# Altium PCB roneMotorBoard-v10.PcbDoc (part 1 of 2)
Units mil, origin at the board's own origin, x right, y up, seen from the top; angles counter-clockwise.
Board outline 3702 x 3936.38 mil, 2 copper layers (Top Layer, Bottom Layer); 100 components, 85 nets, 395 pads, 263 vias.
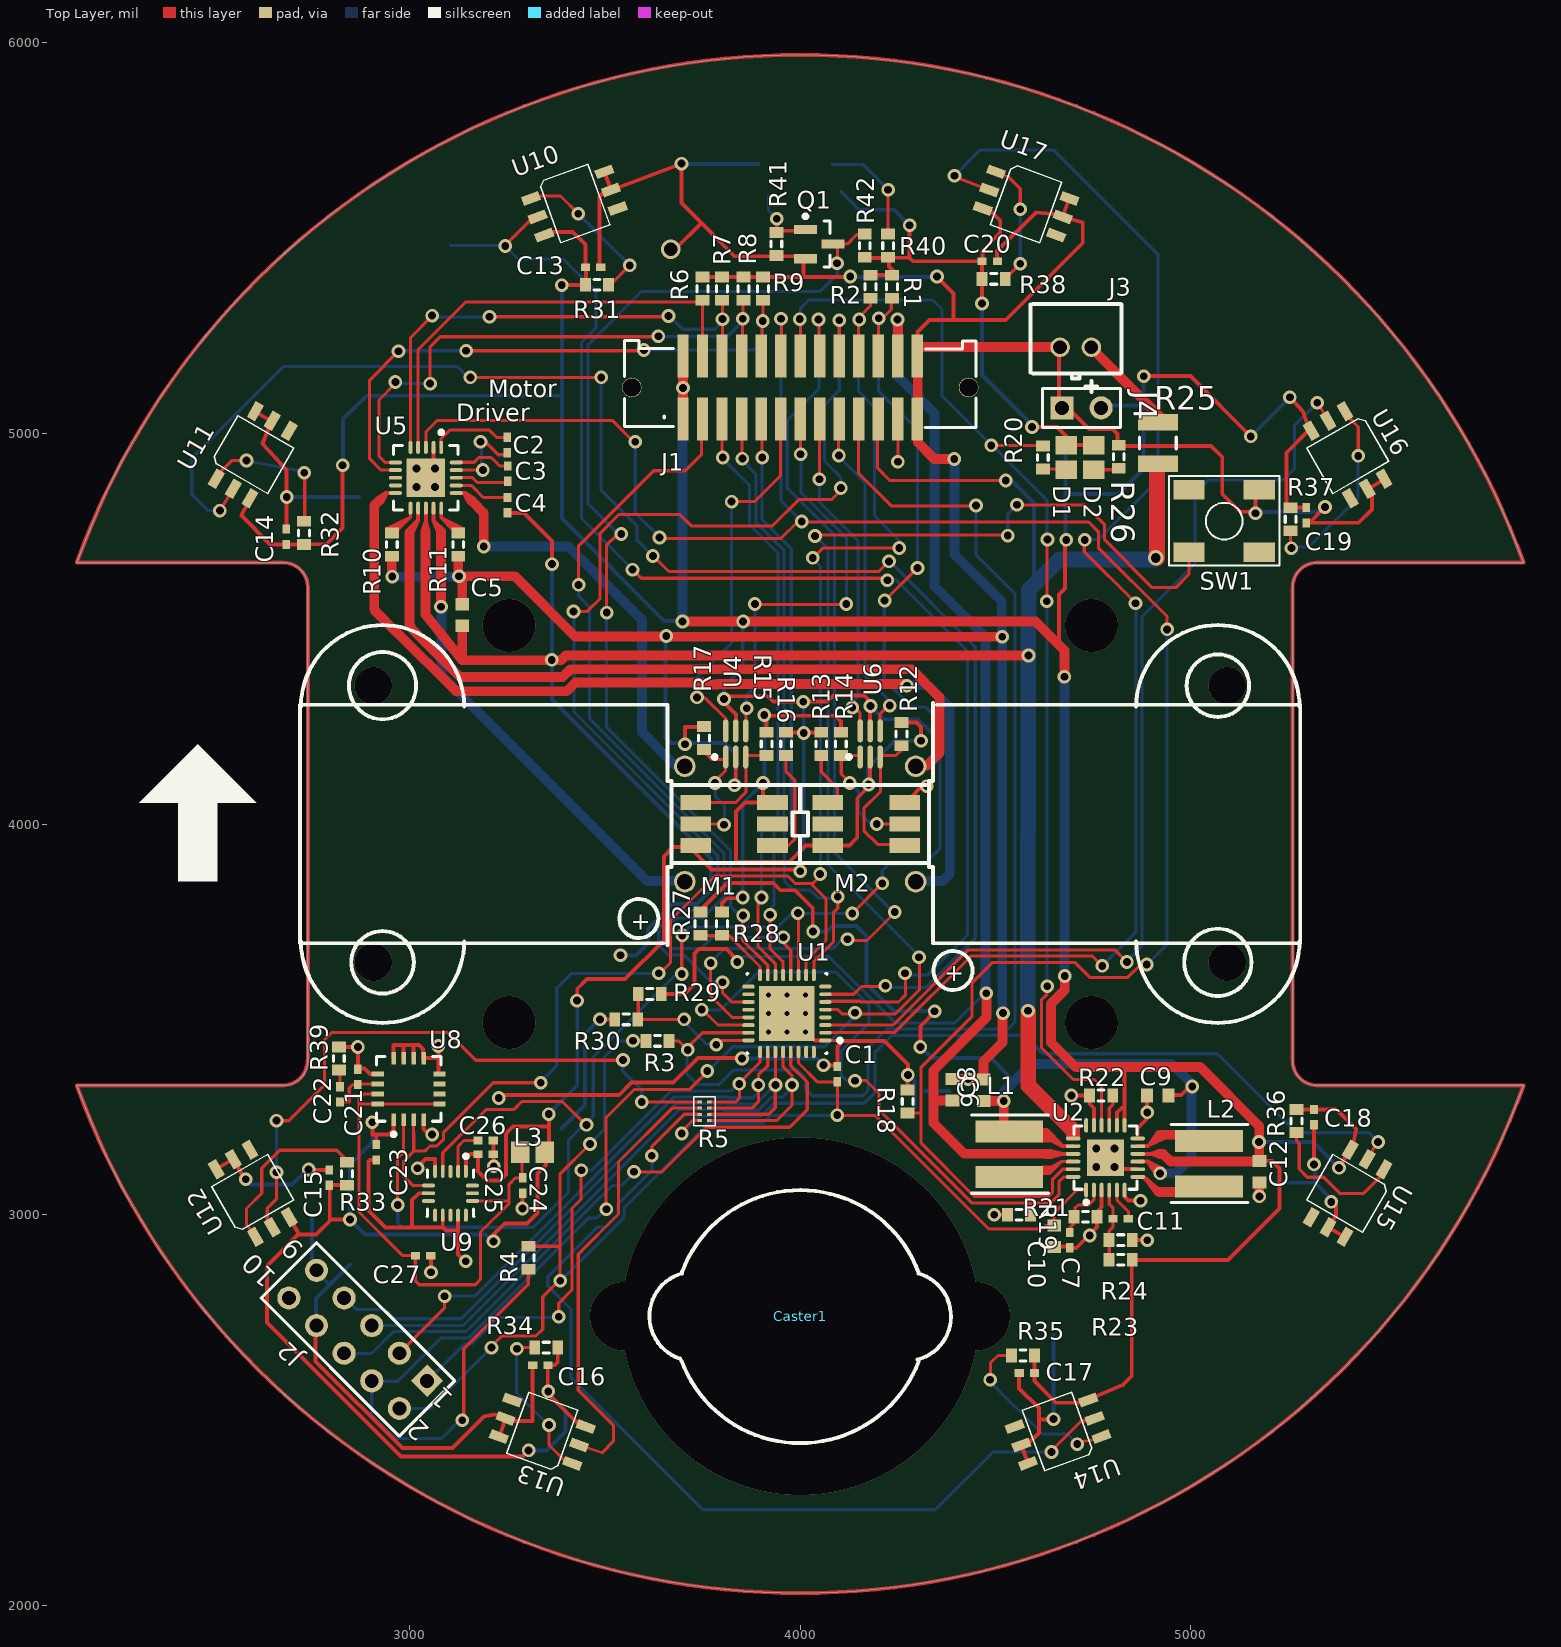
[diagram p0: Top Layer view]
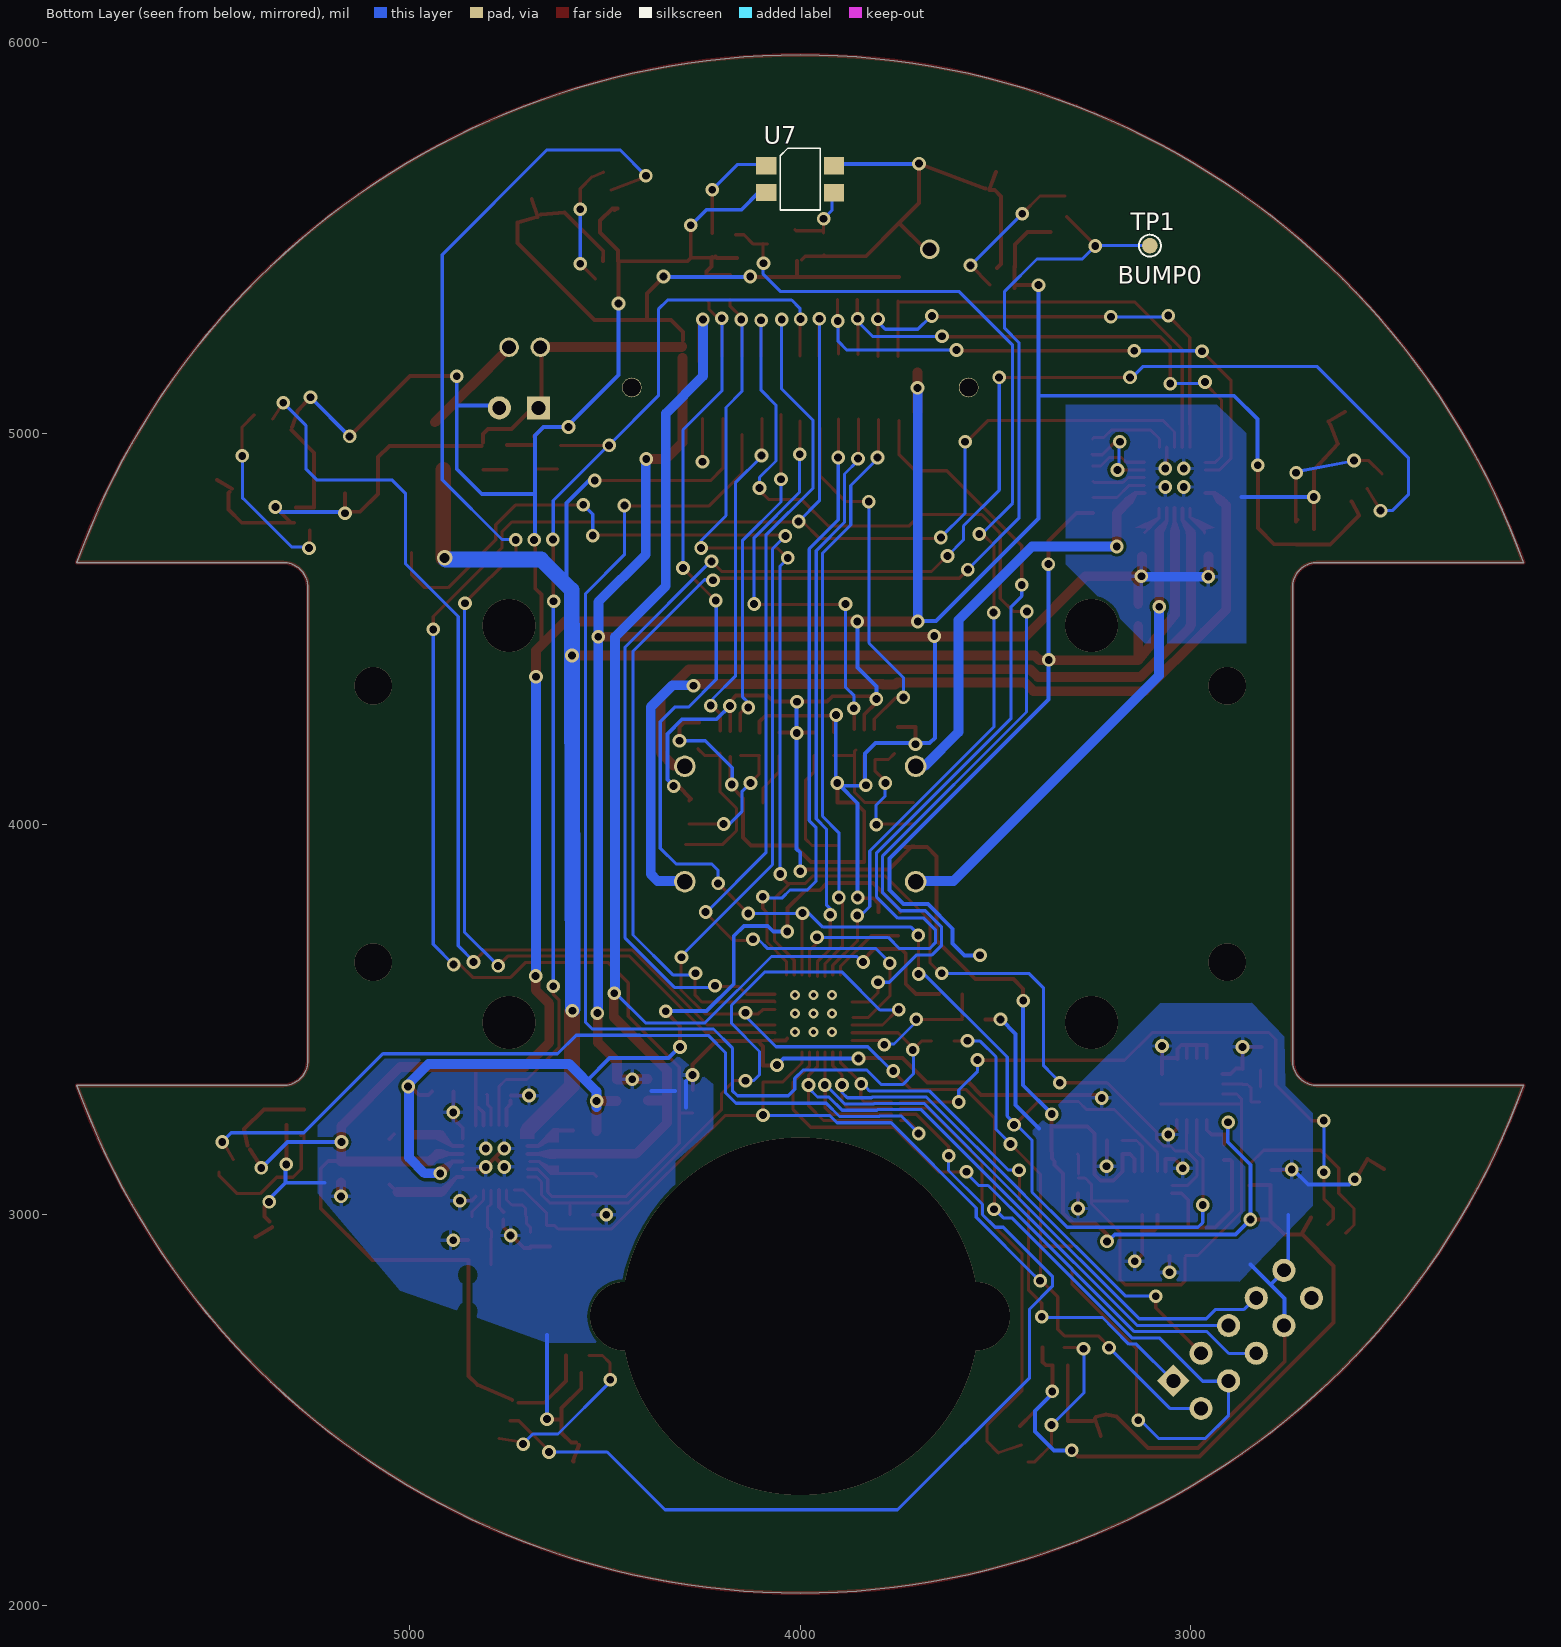
[diagram p1: Bottom Layer view, seen from below]

## Layer stack, top to bottom
Top Layer: signal copper 1.4
Dielectric: dielectric 12.6, FR-4, Dk 4.8
Bottom Layer: signal copper 1.4

## Board outline
2149,3331 2677,3331 ccw(c2677,3394) 2740,3394 2740,4606 ccw(c2677,4606) 2677,4669 2149,4669 cw(c4000,4000) 5851,4669 5323,4669 ccw(c5323,4606) 5260,4606 5260,3394 ccw(c5323,3394) 5323,3331 5851,3331 cw(c4000,4000)

## Design rules (kind name [scope] priority, off if disabled: settings)
Clearance [All] p1: gap=8
PolygonConnect [All] p1: connectstyle=Relief reliefconductorwidth=10 reliefentries=4 polygonreliefangle="90 Angle"
RoutingVias RoutingVias_4 [(IsVia AND InNetClass('All Nets'))] p1: holewidth=20 width=35 viastyle="Through Hole" minholewidth=20 minwidth=35 maxholewidth=20 maxwidth=35
RoutingVias RoutingVias_3 [(IsVia AND InNetClass('All Nets'))] p2: holewidth=20 width=35 viastyle="Through Hole" minholewidth=20 minwidth=35 maxholewidth=20 maxwidth=35
RoutingVias RoutingVias_2 [(IsVia AND InNetClass('All Nets'))] p3: holewidth=20 width=35 viastyle="Through Hole" minholewidth=20 minwidth=35 maxholewidth=20 maxwidth=35
RoutingVias RoutingVias_1 [(IsVia AND InNetClass('All Nets'))] p4: holewidth=20 width=35 viastyle="Through Hole" minholewidth=20 minwidth=35 maxholewidth=20 maxwidth=35
RoutingVias [All] p5: holewidth=20 width=35 viastyle="Through Hole" minholewidth=20 minwidth=35 maxholewidth=20 maxwidth=35
SMDNeckDown [All] p1: percent=50.000
SilkscreenOverComponentPads [All] p1: minsilkscreentomaskgap=10
SolderMaskExpansion [All] p1: expansion=4
Width "Schematic Width Constraint_8" [InNet('3.3V')] p1: maxlimit=100 minlimit=10 preferedwidth=25 minimp=50.000000 maximp=50.000000 favimp=50.000000
Width "Schematic Width Constraint_7" [InNet('VBAT')] p2: maxlimit=50 minlimit=10 preferedwidth=25 minimp=50.000000 maximp=50.000000 favimp=50.000000
Width "Schematic Width Constraint_6" [InNet('VBAT +300')] p3: maxlimit=25 minlimit=10 preferedwidth=25 minimp=50.000000 maximp=50.000000 favimp=50.000000
Width "Schematic Width Constraint_5" [InNet('NetJ3_1')] p4: maxlimit=25 minlimit=10 preferedwidth=25 minimp=50.000000 maximp=50.000000 favimp=50.000000
Width "Schematic Width Constraint_4" [InNet('NetL2_1')] p5: maxlimit=25 minlimit=10 preferedwidth=25 minimp=50.000000 maximp=50.000000 favimp=50.000000
Width "Schematic Width Constraint_3" [InNet('NetL2_2')] p6: maxlimit=25 minlimit=10 preferedwidth=25 minimp=50.000000 maximp=50.000000 favimp=50.000000
Width "Schematic Width Constraint_2" [InNet('5VUSB')] p7: maxlimit=25 minlimit=10 preferedwidth=25 minimp=50.000000 maximp=50.000000 favimp=50.000000
Width "Schematic Width Constraint" [InNet('GND')] p8: maxlimit=25 minlimit=10 preferedwidth=25 minimp=50.000000 maximp=50.000000 favimp=50.000000
Width "Schematic Width Constraint_12" [InNet('MOT_0B')] p9: maxlimit=25 minlimit=10 preferedwidth=20 minimp=50.000000 maximp=50.000000 favimp=50.000000
Width "Schematic Width Constraint_11" [InNet('MOT_0A')] p10: maxlimit=25 minlimit=10 preferedwidth=20 minimp=50.000000 maximp=50.000000 favimp=50.000000
Width "Schematic Width Constraint_10" [InNet('MOT1_B')] p11: maxlimit=25 minlimit=10 preferedwidth=20 minimp=50.000000 maximp=50.000000 favimp=50.000000
Width "Schematic Width Constraint_9" [InNet('MOT1_A')] p12: maxlimit=25 minlimit=10 preferedwidth=20 minimp=50.000000 maximp=50.000000 favimp=50.000000
Width MotorWidth [InNetClass('MotorNets')] p13: maxlimit=25 minlimit=8 preferedwidth=25
Width [All] p14: maxlimit=8 minlimit=8 preferedwidth=8
27 further rules are at their usual default settings.

## Classes and differential pairs
component class motorEncoder: C2 C3 C4 C5 Caster1 CasterBack1 M1 M2 M? R6 R7 R8 R9 R10 R11 R12 R13 R14 R15 R16 R17 U4 U5 U6
component class BumpSensors: C13 C14 C15 C16 C17 C18 C19 C20 R31 R32 R33 R34 R35 R36 R37 R38 TP1 U10 U11 U12 U13 U14 U15 U16 U17
component class GyroAccel: C21 C22 C23 C24 C25 C26 C27 L3 R39 U8 U9
component class MSP430: C1 J1 J2 R1 R2 R3 R4 R5 SW1 U1
component class power: C6 C7 C8 C9 C10 C11 C12 D1 D2 J3 J4 L1 L2 R18 R19 R20 R21 R22 R23 R24 R25 R26 R27 R28 R29 R30 U2 U3
component class LineCliffSensors: Q1 R40 R41 R42 U7

## Components (designator, comment, footprint, x,y, rotation, side; value= is the part's Value field where it differs from the comment)
C1 "Cap Semi" CAPC1005L 4095,3360 r270 top
C2 "Cap Semi" CAPC1005L 3250,4970 r90 top
C3 "Cap Semi" CAPC1005L 3251.31,4896.63 r90 top
C4 "Cap Semi" CAPC1005L 3251,4816 r90 top
C5 "Cap Semi" CAPC1608L 3135,4535 r270 top
C6 "Cap" CAPC1608L 4390,3320 r270 top
C7 "Cap" CAPC1005L 4690,2935 r90 top
C8 "Cap" CAPC1608L 4469.5,3318.5 r270 top
C9 "Cap" CAPC1608L 4915,3305 r180 top
C10 "Cap" CAPC1608L 4650,2945 r270 top
C11 "Cap" CAPC1005L 4820,2990 r0 top
C12 "Cap" CAPC1608L 5175,3110 r90 top
C13 "Cap Semi" CAPC1005L 3470,5425 r180 top
C14 "Cap Semi" CAPC1005L 2685,4735 r270 top locked
C15 "Cap Semi" CAPC1005L 2795,3095 r270 top
C16 "Cap Semi" CAPC1005L 3335,2615 r0 top
C17 "Cap Semi" CAPC1005L 4580,2595 r0 top
C18 "Cap Semi" CAPC1005L 5315,3250 r90 top locked
C19 "Cap Semi" CAPC1005L 5295,4790 r90 top
C20 "Cap Semi" CAPC1005L 4485,5440 r180 top locked
C21 "Cap Semi" CAPC1005L 2868,3353 r90 top
C22 "Cap Semi" CAPC1005L 2822.5,3308 r90 top
C23 "Cap Semi" CAPC1005L 2915,3160 r90 top
C24 "Cap Semi" CAPC1005L 3290,3075 r90 top
C25 "Cap Semi" CAPC1005L 3195,3155 r180 top
C26 "Cap Semi" CAPC1005L 3195,3190 r180 top
C27 "Cap Semi" CAPC1005L 3035,2895 r180 top
Caster1 "non connect" "3/4\"CASTER2" 4000,2740 r180 top locked
D1 "Charge" INDC2012L 4681,4938 r270 top
D2 "Power" INDC2012L 4751,4938 r270 top
J1 "HCOMM/MOT" "HeaderSM 13x2" 4000,5117 r90 top locked
J2 "JTAG" HDR2X5 3045,2575 r135 top locked
J3 "Bat" BatteryConnJST 4705,5220 r180 top
J4 "3.3V conn" HDR1X2 4670,5065 r0 top
L1 "3.3uH" IndPow 4535,3155 r90 top
L2 "2.2uH" IndPow 5046,3131 r90 top locked
L3 "Inductor" INDC2012L 3315,3160 r0 top
M1 "motorEncoder_V7b" motorEncoder_V7b 3830,4000 r180 top locked
M2 "motorEncoder_V7b" motorEncoder_V7b 4170,4000 r0 top locked
Q1 "NPN" SOT-23 4049,5484 r0 top
R1 "Res3" RESC1608L 4235,5375 r90 top
R2 "Res3" RESC1608L 4180,5375 r90 top
R3 "Res3" RESC1608L 3635,3445 r180 top
R4 "Res3" RESC1608L 3305,2890 r90 top
R5 "0" "4-RES ARRAY" 3755,3265 r180 top
R6 "Res3" RESC1608L 3750,5370 r90 top
R7 "Res3" RESC1608L 3800,5370 r90 top
R8 "Res3" RESC1608L 3855,5370 r90 top
R9 "Res3" RESC1608L 3905,5370 r90 top
R10 "Res3" RESC1608L 2955,4715 r270 top
R11 "Res3" RESC1608L 3125,4715 r270 top
R12 "" RESC1608L 4259,4230 r270 top
R13 "" RESC1608L 4054,4205 r90 top
R14 "" RESC1608L 4104,4205 r270 top
R15 "" RESC1608L 3914,4205 r90 top
R16 "" RESC1608L 3964,4205 r90 top
R17 "" RESC1608L 3754,4220 r270 top
R18 "Res3" RESC1608L 4275,3290 r270 top
R19 "Res3" RESC1608L 4560,3000 r0 top
R20 "Res3" RESC1608L 4621,4938 r270 top
R21 "Res3" RESC1608L 4730,2995 r180 top
R22 "Res3" RESC1608L 4770,3305 r180 top
R23 "Res3" RESC1608L 4820,2885 r180 top
R24 "Res3" RESC1608L 4820,2935 r0 top
R25 "Res3" RESC3225L 4915,4975 r90 top
R26 "Res3" RESC1608L 4815,4940 r270 top
R27 "Res3" RESC1608L 3745,3745 r90 top
R28 "Res3" RESC1608L 3800,3745 r270 top
R29 "Res3" RESC1608L 3615,3565 r0 top
R30 "Res3" RESC1608L 3555,3500 r0 top
R31 "Res3" RESC1608L 3480,5380 r180 top
R32 "Res3" RESC1608L 2730,4745 r270 top
R33 "Res3" RESC1608L 2840,3105 r270 top
R34 "Res3" RESC1608L 3350,2660 r0 top
R35 "Res3" RESC1608L 4570,2640 r0 top
R36 "Res3" RESC1608L 5270,3240 r90 top locked
R37 "Res3" RESC1608L 5255,4780 r90 top
R38 "Res3" RESC1608L 4495,5395 r180 top locked
R39 "Res3" RESC1608L 2819.5,3400 r270 top
R40 "Res3" RESC1608L 4225,5480 r90 top
R41 "Res3" RESC1608L 3939,5484 r270 top
R42 "Res3" RESC1608L 4165,5480 r270 top
SW1 "reset button" SwitchTall-TL330 5085,4775 r0 top
TP1 "TestPoint" TestPoint 3105,5480 r180 bottom
U1 "MSP430" MSP430_32PIN 3966,3515 r180 top locked
U2 "LTC3566" QFN-24 4781,3146 r90 top
U4 "schmit trigger" DCK(R-PDSO-C6) 3835,4205 r90 top
U5 "MOTOR-A3906" QFN-20 3042,4886 r270 top locked
U6 "schmit trigger" DCK(R-PDSO-C6) 4179,4205 r90 top
U7 "GP2S27TJ000F" GP2S27J0000F 4000,5650 r180 bottom locked
U8 "L3G4200D" L3G2004D 2998,3322 r90 top locked
U9 "MMA8452Q" MMA8452Q 3105,3055 r270 top locked
U10 "SFH9240-Z" SFH9240-Z 3422,5588 r20 top locked
U11 "SFH9240-Z" SFH9240-Z 2599,4945 r60 top locked
U12 "SFH9240-Z" SFH9240-Z 2599,3055 r120 top locked
U13 "SFH9240-Z" SFH9240-Z 3340,2445 r160 top locked
U14 "SFH9240-Z" SFH9240-Z 4660,2445 r200 top locked
U15 "SFH9240-Z" SFH9240-Z 5401,3055 r240 top locked
U16 "SFH9240-Z" SFH9240-Z 5401,4945 r300 top locked
U17 "SFH9240-Z" SFH9240-Z 4578,5588 r340 top locked

## Footprints (in the part's own frame and the unit in brackets; to place one, negate y for a bottom-side part, rotate by r counter-clockwise, add the part's x,y. Pads: shape width x height; smd on the part's side, far side on the other; paste and mask are expansions set on the pad)
"3/4\"CASTER2" [mil] "3/4\" caster for board"
  silkscreen extent -386,-323 386,324
"4-RES ARRAY" [mm]
  rect 0.3x0.2 smd mask+0.05: 1(-0.3,0.6) 2(-0.3,0.2) 3(-0.3,-0.2) 4(-0.3,-0.6) 5(0.3,-0.6) 6(0.3,-0.2) 7(0.3,0.2) 8(0.3,0.6)
  silkscreen extent -0.71,-0.94 0.69,0.94
BatteryConnJST [mil] "Connector for Battery"
  round 50 hole 35: 1(-40,0) 2(40,0)
  silkscreen extent -117,-110 116,115
CAPC1005L [mm] "Chip Capacitor, Body 1.0x0.5mm, IPC High Density"
  rect 0.6x0.5 smd: 1(-0.5,0) 2(0.5,0)
  body extent -0.55,-0.3 0.55,0.3, height 1.3
CAPC1608L [mm] "Chip Capacitor, Body 1.6x0.8mm, IPC High Density"
  rect 0.8x0.9 smd: 1(-0.7,0) 2(0.7,0)
  body extent -0.87,-0.48 0.87,0.48, height 1.3
DCK(R-PDSO-C6) [mm] "TSOP, 6-Leads, Body 2.2x1.4mm (max), Pitch 0.65mm, IPC Medium Density"
  oval 1.5x0.35 smd: 1(-0.85,0.65) 2(-0.85,0) 3(-0.85,-0.65) 4(0.85,-0.65) 5(0.85,0) 6(0.85,0.65)
  silkscreen extent -0.97,1.25 -0.73,1.5, body extent -0.7,-1.07 0.7,1.08, height 1.1
GP2S27J0000F [mil] "Phototransistor Output, Compact Reflective Photointerrupter"
  rect 52x44 smd: 1(-86.61,34.45) 2(-86.61,-33.74) 3(86.61,-34.45) 4(86.61,34.45)
  silkscreen extent -51,-79 51,79, body extent -59,-78 59,79, height 67
HDR1X2 [mm] "Connector; Header; 2 Position"
  rect 1.5x1.5 hole 0.9: 1(0,0)
  round 1.5 hole 0.9: 2(2.54,0)
  silkscreen extent -1.27,-1.27 3.81,1.27
HDR2X5 [mm] "Connector; Header; 5x2 Position"
  rect 1.5x1.5 hole 0.9: 1(0,0)
  round 1.5 hole 0.9: 2(0,2.54) 3(2.54,0) 4(2.54,2.54) 5(5.08,0) 6(5.08,2.54) 7(7.62,0) 8(7.62,2.54) 9(10.16,0) 10(10.16,2.54)
  silkscreen extent -1.27,-1.27 11.43,3.81
"HeaderSM 13x2" [mm]
  rect 2.795x0.74 smd: 1(-2.032,7.62) 2(2.033,7.62) 3(-2.032,6.35) 4(2.033,6.35) 5(-2.032,5.08) 6(2.033,5.08) 7(-2.032,3.81) 8(2.033,3.81) 9(-2.032,2.54) 10(2.033,2.54) 11(-2.032,1.27) 12(2.033,1.27) 13(-2.032,0) 14(2.033,0) 15(-2.032,-1.27) 16(2.033,-1.27) 17(-2.032,-2.54) 18(2.033,-2.54) 19(-2.032,-3.81) 20(2.033,-3.81) 21(-2.032,-5.08) 22(2.033,-5.08) 23(-2.032,-6.35) 24(2.033,-6.35) 25(-2.032,-7.62) 26(2.033,-7.62)
  round 1.27 hole 1.19: c1(0,10.947) c2(0,-10.947)
  silkscreen extent -2.59,-11.43 3.06,11.43
INDC2012L [mm] "Chip Inductor, Body 2.0x1.2mm, IPC High Density"
  rect 1.2x1.4 smd: 1(-0.8,0) 2(0.8,0)
  body extent -1.1,-0.7 1.1,0.7, height 0.55
IndPow [mil]
  rect 56.5x173 smd: 1(-58.25,0) 2(58.25,0)
  silkscreen extent -100,-100 100,97
L3G2004D [mm] "gyroscope"
  rect 0.8x0.3 smd: 1(-2,0.975) 2(-2,0.325) 3(-2,-0.325) 4(-2,-0.975) 9(2,-0.975) 10(2,-0.325) 11(2,0.325) 12(2,0.975)
  rect 0.3x0.8 smd: 5(-0.975,-2) 6(-0.325,-2) 7(0.325,-2) 8(0.975,-2) 13(0.975,2) 14(0.325,2) 15(-0.325,2) 16(-0.975,2)
  silkscreen extent -3.07,-2.1 2.1,2.1, body extent -2.08,-2.08 2.07,2.07, height 1.1
MMA8452Q [mm] "accelerometer-v9"
  oval 0.85x0.25 smd: 1(-1.425,1) 2(-1.425,0.5) 3(-1.425,0) 4(-1.425,-0.5) 5(-1.425,-1) 9(1.425,-1) 10(1.425,-0.5) 11(1.425,0) 12(1.425,0.5) 13(1.425,1)
  oval 0.25x0.85 smd: 6(-0.5,-1.425) 7(0,-1.425) 8(0.5,-1.425) 14(0.5,1.425) 15(0,1.425) 16(-0.5,1.425)
  silkscreen extent -2.52,-1.52 1.5,1.53, body extent -1.5,-1.5 1.5,1.5, height 1
motorEncoder_V7b [mm] "Precision Wire Wound Inductor, 2-Leads, Body 2.5x2.3mm, IPC Medium Density"
  rect 2x1 smd: A(-2.524,1.4) C(2.476,1.4) E1(2.476,0) E2(2.476,-1.4) K(-2.524,-1.4) NC(-2.524,0)
  round 1.4 hole 1: M1(3.185,3.75) M2(3.185,-3.75)
  Mechanical 1 keep-out region: 4.496,-7.849 28.118,-7.849 28.118,7.645 4.496,7.645
  silkscreen extent -4.83,-12.93 28.18,12.93
MSP430_32PIN [mm] "32 pin QFN"
  oval 0.8x0.25 smd: 1(-2.5,1.75) 2(-2.5,1.25) 3(-2.5,0.75) 4(-2.5,0.25) 5(-2.5,-0.25) 6(-2.5,-0.75) 7(-2.5,-1.25) 8(-2.5,-1.75) 17(2.5,-1.75) 18(2.5,-1.25) 19(2.5,-0.75) 20(2.5,-0.25) 21(2.5,0.25) 22(2.5,0.75) 23(2.5,1.25) 24(2.5,1.75)
  oval 0.25x0.8 smd: 9(-1.75,-2.5) 10(-1.25,-2.5) 11(-0.75,-2.5) 12(-0.25,-2.5) 13(0.25,-2.5) 14(0.75,-2.5) 15(1.25,-2.5) 16(1.75,-2.5) 25(1.75,2.5) 26(1.25,2.5) 27(0.75,2.5) 28(0.25,2.5) 29(-0.25,2.5) 30(-0.75,2.5) 31(-1.25,2.5) 32(-1.75,2.5)
  rect 3.6x3.6 smd: 33(0,0)
  silkscreen extent -3.58,-2.6 2.6,2.6, body extent -2.58,-2.57 2.57,2.58, height 1
QFN-20 [mm] "QFN, 20-Leads, Body 4.2x4.2mm (max), Pitch 0.50mm, IPC Medium Density"
  oval 0.85x0.25 smd: 1(-1.975,1) 2(-1.975,0.5) 3(-1.975,0) 4(-1.975,-0.5) 5(-1.975,-1) 11(1.975,-1) 12(1.975,-0.5) 13(1.975,0) 14(1.975,0.5) 15(1.975,1)
  oval 0.25x0.85 smd: 6(-1,-1.975) 7(-0.5,-1.975) 8(0,-1.975) 9(0.5,-1.975) 10(1,-1.975) 16(1,1.975) 17(0.5,1.975) 18(0,1.975) 19(-0.5,1.975) 20(-1,1.975)
  rect 2.5x2.5 smd: 21(0,0)
  silkscreen extent -3.07,-2.1 2.1,2.1, body extent -2.07,-2.07 2.07,2.07, height 0.8
QFN-24 [mm] "QFN, 24-Leads, Body 4.1x4.1mm (max), Pitch 0.50mm, IPC Medium Density"
  oval 0.95x0.25 smd: 1(-2.1,1.25) 2(-2.1,0.75) 3(-2.1,0.25) 4(-2.1,-0.25) 5(-2.1,-0.75) 6(-2.1,-1.25) 13(2.1,-1.25) 14(2.1,-0.75) 15(2.1,-0.25) 16(2.1,0.25) 17(2.1,0.75) 18(2.1,1.25)
  oval 0.25x0.95 smd: 7(-1.25,-2.1) 8(-0.75,-2.1) 9(-0.25,-2.1) 10(0.25,-2.1) 11(0.75,-2.1) 12(1.25,-2.1) 19(1.25,2.1) 20(0.75,2.1) 21(0.25,2.1) 22(-0.25,2.1) 23(-0.75,2.1) 24(-1.25,2.1)
  rect 2.4x2.4 smd: 25(0,0)
  silkscreen extent -3.02,-2.05 2.05,2.05, body extent -2.05,-2.05 2.05,2.05, height 0.8
RESC1608L [mm] "Chip Resistor, Body 1.6x0.8mm, IPC High Density"
  rect 0.7x0.9 smd: 1(-0.75,0) 2(0.75,0)
  silkscreen extent -0.2,-0.35 0.2,0.35, body extent -0.85,-0.48 0.85,0.48, height 0.9
RESC3225L [mm] "Chip Resistor, Body 3.2x2.5mm, IPC High Density"
  rect 1.1x2.6 smd: 1(-1.35,0) 2(1.35,0)
  silkscreen extent -0.4,-1.2 0.4,1.2, body extent -1.68,-1.32 1.68,1.32, height 0.9
SFH9240-Z [mil] "Reflective Interrupter with Schmitt-Trigger"
  rect 47x24 smd: 1(-100,50) 2(-100,0) 3(-100,-50) 4(100,-50) 5(100,0) 6(100,50)
  silkscreen extent -67,-83 67,83, body extent -59,-78 59,79, height 67
SOT-23 [mm] "SOT23, 3-Leads, Body 3.0x2.5mm (max), Pitch 0.95mm, IPC Medium Density"
  rect 1.5x0.6 smd: 1(-0.9,0.95) 2(-0.9,-0.95) 3(0.9,0)
  silkscreen extent -1.02,-1.5 0.7,1.92, body extent -0.7,-1.5 0.7,1.5, height 1.2
SwitchTall-TL330 [mil] "Small SMDTall Tact Switch E-Switch TL330"
  rect 80x50 smd: 1(-90,80) 2(90,80) 3(-90,-80) 4(90,-80)
  silkscreen extent -141,-114 141,115
TestPoint [mil]
  round 40 smd: 1(0,0)
  silkscreen extent -28,-28 28,28

## Part data
C1 C2 C3 C4 C5 C13 C14 C15 C16 C17 C18 C19 C20 C21 C22 C23 C24 C25 C26 C27: "Capacitor (Semiconductor SIM Model)"
C6 C7 C8 C9 C10 C11 C12: "Capacitor"
Caster1: library part "Caster 3/4in", "This is just a space saver to get the caster onto the pcb"
D1 D2: library part LED2, "Typical RED, GREEN, YELLOW, AMBER GaAs LED"
J1: library part HCOMM/HMOT, "Header, 2X20, 50mil, IDC"
J2: library part "Header 5X2", "Header, 5-Pin, Dual row"
J3: library part BatteryConnJST
J4: library part "Header 2", "Header, 2-Pin"
L1 L2: library part Inductor
R1 R2 R3 R4 R6 R7 R8 R9 R10 R11 R18 R19 R20 R21 R22 R23 R24 R25 R26 R27 R28 R29 R30 R31 R32 R33 R34 R35 R36 R37 R38 R39 R40 R41 R42: "Resistor"
R5: library part "4 Res Array"
R12 R13 R14 R15 R16 R17: library part Res3, "Resistor"
SW1: library part Switch-TL330
U1: library part MSP430_32pin
U8: "3axis gyroscope, SPI"

## Via types
v1: diameter 35, hole 20, Top Layer to Bottom Layer, 233 vias
v2: diameter 25.98, hole 12.99, Top Layer to Bottom Layer, tented top, 9 vias
v3: diameter 35, hole 20, Top Layer to Bottom Layer, tented top, 8 vias
v4: diameter 136, hole 136, Top Layer to Bottom Layer, 4 vias
v5: diameter 96, hole 96, Top Layer to Bottom Layer, 4 vias
v6: diameter 175, hole 175, Top Layer to Bottom Layer, 2 vias
v7: diameter 50, hole 35, Top Layer to Bottom Layer, 1 vias
v8: diameter 40, hole 25, Top Layer to Bottom Layer, 1 vias
v9: diameter 915, hole 915, Top Layer to Bottom Layer, 1 vias

## Nets (pads, with @x,y where several pads share a name; then routed paths per layer and width w, separated by ;. In a path a pad name is that pad's centre, name@x,y a point inside that pad or via, vN(x,y) a via of type N, cw(c..) or ccw(c..) an arc to the next point about the centre after c; other vN are vias at no path point)
3.3LDO: C1.2 C10.1 J2.2 R3.2 R4.2 U1.30 U2.1 | length 3362.9
  Top Layer w8: v1@3211,2664 3237,2690 3324,2690 3341,2707 3341,2790 v1@3389,2838 ; R4.2@3305,2919.53 3385.03,2919.53 ; v1@3385,2835 3385,3104 v1(3462,3181) ; v1@3570.5,3444.5 R3.2@3606,3444.5 ; U1.30@3995.53,3416.57 3995.53,3388.47 4044,3340 4095.5,3340 v1@4095.5,3255 ; v1@4095.5,3254 4192,3254 4482,2964 4620,2964 4629,2973 4649,2973 4649,3004 4708.48,3063.48 U2.1@4731.79,3063.48
  Bottom Layer w8: J2.2@2977.5,2504.5 3054,2504.5 3209.5,2660 v1(3210,2660) ; v1@3388.5,2834.5 3397.5,2834.5 3397.5,2843 3399,2843 3549.5,2993.5 3549.5,3017.5 3767.39,3235.39 3905.99,3235.39 3925.1,3254.5 v1@4101.5,3254.5 ; v1@3468.37,3188 3468.37,3188.37 3499,3219 3499,3404 3539.5,3444.5 v1@3572.5,3444.5
  other v1: 3386,2831 4095,3255 3572,3445.5
3.3V: C12.2 C13.2 C14.2 C15.2 C16.2 C17.2 C18.2 C19.2 C20.2 C23.2 C25.2 D1.1 D2.1 J1.1 J1.2 J4.2 L3.2 M1.C M2.C R1.2 R2.2 R13.2 R16.2 R23.1 R31.2 R32.2 R33.2 R34.2 R35.2 R36.2 R37.2 R38.2 R40.1 R42.2 U2.10 U2.13 U2.14 U4.5 U6.5 U7.2 U8.1 U9.1 U10.3 U11.3 U12.3 U13.3 U14.3 U15.3 U16.3 U17.3 | length 18342.8
  Top Layer w0: 4851,2617 4851,2753
  Top Layer w10: U11.3@2589,4825 2570,4789 2643.53,4715.47 R32.2@2730,4715.47 ; U12.3@2692.3,2993.4 2718,2949 ; R32.2@2730,4716 2788,4716 2829,4757 v1(2829,4918) ; v1(2848,2988) 2800,2988 ; R33.2@2850,3075 2849,3076 2796,3076 2796,2988 2800,2988 ; v1@2906,3237 2906,3205 2948,3205 2959.61,3216.61 U8.1@2959.61,3243.26 ; C23.2@2915,3179.69 2915,3203 ; U9.1@3144.37,3111.1 3144.37,3143.37 3156,3155 C25.2@3175,3155 ; C25.2@3175.31,3155 3175.31,3110.69 3198,3088 3232,3088 3246.88,3102.88 3246.88,3208.38 3264.5,3226 3357,3226 ; v1@3214,2935 3214,2948 3244,2978 3301,2978 3328,3005 3328,3106 3349,3127 3349,3137 3355.5,3143.5 L3.2@3355.5,3159 ; v1(3305,2397) 3289,2381 2978.54,2381 2635,2724.54 2635,2869 2715,2949 2718,2949 ; v1@3351,2546 3403.69,2493.31 U13.3@3438,2459 ; v1@3354,2549 C16.2@3354,2615 ; C16.2@3354.69,2615 3371,2615 3379.53,2623.53 R34.2@3379.53,2660 ; L3.2@3357,3162 3357,3226 ; v1@3357,3258.5 3357,3226 ; U10.3@3359,5515 3418,5515 3450.31,5482.69 C13.2@3450.31,5425 ; v1(3390,5379) R31.2@3446,5379 ; v1@3429.5,3554.5 3429.5,3578.5 3454,3603 3552,3603 3651,3702 3651,3917 3674.88,3940.88 M1.C@3732.56,3940.88 ; R31.2@3452,5371 C13.2@3452,5426.53 ; M1.C@3708.31,3943 3714,3943 3773,3884 v1@4001,3884 ; v1@3805,4325 3805,4310.87 3836,4279.87 U4.5@3836,4241.46 ; v1@3808,4327 3917,4327 3931,4313 v1@4009,4313 ; R16.2@3964,4234.53 R13.2@4052.53,4234.53 ; v1@4010,4313 4069,4313 4085,4329 4164,4329 v1@4175,4318 ; R42.2@4162,5448 4212.47,5448 R40.1@4217,5452.53 ; U6.5@4179,4238.46 v1@4179,4302 ; R2.2@4180,5404.53 R1.2@4230.47,5404.53 ; R40.1@4213.47,5449 R40.1@4225,5449 ; R40.1@4225,5450.47 R40.1@4225,5449 ; R40.1@4227,5450 R40.1@4227,5449 ; R1.2@4230.53,5399.53 4240,5399.53 4240,5414 4227,5427 R40.1@4227,5449 ; 4278,5449 R40.1@4227,5449 ; v1(4280,5532) 4280,5448 4288,5440 4318,5440 C20.2@4465.31,5440 R38.2@4465.31,5399.69 ; M2.C@4284,4060 4279.5,4064.5 4313,4098 v1@4323,4098 ; v1@4465.47,5333.53 R38.2@4465.47,5395 ; C20.2@4466,5440 4466,5468 4512,5514 4512,5544 4480.78,5575.22 U17.3@4466.93,5575.22 U17.3@4473.39,5572.61 ; U17.3@4472,5574 U17.3@4473.39,5572.61 ; U17.3@4475,5571 U17.3@4473.39,5572.61 ; v1(4593,5016) 4657,5016 D1.1@4681,4992 ; R35.2@4599.53,2640 4599.53,2574.47 4655,2519 U14.3@4721,2519 ; 4662,4458 4662,4587 4678,4603 v1@4678,4710 ; 4666,4451 4666,4454 ; D1.1@4681,4969.5 D2.1@4749.5,4969.5 ; U14.3@4736.87,2526.19 4825.99,2564.78 ; D2.1@4750.5,4970 D2.1@4751,4969.5 ; U2.14@4810.53,3228.83 4810.53,3261.49 4823.02,3273.98 4830.21,3273.98 4830.21,3378 ; 4826,2565 4848.5,2587.5 4848.5,2884 5095,2884 5227,3016 5227,3118.33 5207.77,3137.56 C12.2@5175,3137.56 ; U2.13@4830.21,3228.83 4830.21,3273.19 ; U2.10@4863.68,3156 4921,3156 ; v1@4878,5146 4999,5146 v1(5153,4992) ; v1(5253,5092) 5286,5057 U16.3@5300,5016 ; R36.2@5270,3269.53 5372.47,3269.53 5423,3219 U15.3@5414,3177 ; C19.2@5290,4809.69 5244,4809.69 5244,4950 U16.3@5302,5008 ; v1@5378.29,3120.45 U15.3@5407.7,3166.6 ; 2718,2949 2761,2949 2800,2988 ; R40.1@4225,5449 R40.1@4227,5449
  Top Layer w25: v1(3699,4518) v1(3854,4518) 4602,4518 4666,4454 4676,4444 v1(4676,4377) ; J1.1@3700,5055 v1(3700,5116) J1.2@3700,5156 ; v1(4677,3611) 4677,3575 4642,3540 4642,3441 4705,3378 4830.21,3378 5023.72,3378 5174,3227.72 5174,3225 5174.5,3224.5 5174.5,3138.06 C12.2@5175,3137.56 ; 4921,3156 4928.28,3156 4948.28,3136 C12.2@5175,3136
  Bottom Layer w10: v1@2830,4918 2830,5036 2890,5096 3385,5096 ; v1@2900,3239 2906,3233 2906,3186 2848,3128 v1(2848,2988) 2886,2950 3195,2950 v1@3213.5,2931.5 ; v1(3305,2397) 3351,2397 3399,2445 3399,2498 v1@3352,2545 ; v1@3357,3250.5 3357,3259 3429.5,3331.5 v1@3429.5,3544.5 ; v1(3390,5379) 3390,4782 3652,4520 3699,4520 v1@3705,4520 ; v1@3805,4326 3805,4352 3853,4400 v1@3853,4511 ; v1@4000,3883 4000,3927 4009,3936 v1(4009,4233) v1@4009,4311 ; U7.2@4105,5617 4150,5572 4240,5572 v1(4280,5532) ; v1(4180,4302) 4214,4268 4302,4268 4340,4230 4340,4114 v1@4325,4099 ; v1(4465,5332) 4465,5149 v1@4593,5021 ; v1(4593,5016) 4657,5016 4679,4994 4679,4844 ; v1@4679,4717 4679,4844 ; J4.2@4793,5071 4878,5071 ; v1(4879,5146) 4879,4908 4815,4844 4679,4844 ; v1(5153,4992) v1(5253,5092) ; v1(5174,3186) 5312,3186 v1@5369.5,3128.5
  Bottom Layer w25: v1(3699,4518) 3699,4520 v1@3699,5115 ; v1@4676,3611 v1(4676,4377)
  other v1: 3355,2548 3215,2932 5379,3120 2905,3237 3356.5,3257.5 3429,3548 4000,3879 4324,4097 4008,4313 3805,4320 4681,4727
5V_BOOST: J1.23 | length 110
  Top Layer w8: v1(4250,4927) J1.23@4250,5036.98
5VUSB: C6.2 J1.24 R29.2 U2.21 | length 3773
  Top Layer w10: R29.2@3644.53,3565 3704,3565 3730,3591 3730,3669 3741,3680 3811,3680 v1@3840,3651 ; 4641,3156 U2.21@4698.32,3156
  Top Layer w25: J1.24@4250,5184 J1.24@4250,5197.02 v1@4250,5289 ; C6.2@4390,3292.44 4341,3292.44 ; v1@4477,3559 4477,3505.5 4341,3369.5 4341,3292.44 ; 4641,3156 4420,3156 4341,3235 4341,3292.44
  Bottom Layer w8: v1@3845,3651 3855,3661 4073.5,3661 4243.5,3491 4396,3491 v1@4471,3566
  Bottom Layer w25: v1@4249,5290 4249,5146 4344,5051 4344,4609 4474,4479 v1@4474,3567
  other v1: 4476,3567 3839,3647 4249,5291
5VUSB_SENSE: R29.1 R30.2 U1.24 | length 367.1
  Top Layer w8: R30.2@3584.53,3500 v1@3696,3500 ; R30.2@3585.47,3504.53 R29.1@3585.47,3565 ; v1@3788,3437 3797.1,3446.1 U1.24@3867.57,3446.1
  Bottom Layer w8: v1@3700,3497 3760,3437 v1@3787,3437
  other v1: 3785,3435 3703,3500
BUMP0: TP1.1 U1.6 U10.2 | length 3443.2
  Top Layer w8: v1(3245,5479) v1@3245,5481 ; v1@3245,5484 v1@3245,5481 ; U10.2@3318,5554 v1@3245,5481 ; v1(3571,4651) 3593,4629 v1@4226,4629 ; U1.6@4064.43,3544.53 4066.4,3546.5 4152.22,3546.5 4154.19,3544.53 4251.65,3544.53 4269,3561.88 v1@4269,3613
  Bottom Layer w8: TP1.1@3105,5480 v1@3244,5480 ; v1(3245,5479) 3278,5446 3394,5446 3477,5363 3477,5268.63 3440.5,5232.13 3440.5,4782.5 v1@3572,4651 ; v1@4226,4629 4230,4625 4245,4625 4428,4442 4428,3716 4326,3614 v1@4270,3614
  other v1: 4268,3618 4223,4624
BUMP1: U1.7 U11.2 | length 4058.9
  Top Layer w8: v1(2515,4802) U11.2@2549,4858 ; v1(3156,5143) v1@3491.5,5143 ; v1@3623,4687 3664,4646 4201,4646 v1(4227,4672) ; U1.7@4064.43,3564.21 4137.21,3564.21 4157,3584 v1@4214.32,3584
  Bottom Layer w8: v1(2515,4802) 2485,4802 2443,4844 2443,4936 2678,5171 3122,5171 3150,5143 v1(3156,5143) ; v1@3490.5,5143.5 3490.5,4854.5 3582,4763 3582,4727 v1(3623,4686) ; v1@4210,3585 4220.5,3574.5 4228,3582 4322,3582 4448,3708 4448,4453 v1@4229,4672
  other v1: 4218,3586 3491,5143
BUMP2: R5.5 U12.2 | length 1635.4
  Top Layer w8: U12.2@2650,2975 2636,2989 2636,3017 2660,3041 v1@2660,3108 ; v1(2660,3241) 2660,3240.5 2691,3240.5 2783,3332.5 2783,3448.5 2800.5,3466 3099.5,3466 3170,3395.5 v1@3546.5,3395.5 ; v1(3594.38,3288.62) R5.5@3743.19,3288.62
  Bottom Layer w8: v1(2660,3241) 2660,3112 v1@2662,3110 ; v1@3546,3397 3546,3367.5 3594.38,3319.12 v1(3594.38,3288.62)
  other v1: 2660,3109 3546.5,3396
BUMP3: R5.6 U13.2 | length 1163.5
  Top Layer w8: U13.2@3433.97,2410.8 3493,2391 3522,2420 3522,2461 3432,2551 3432,2899 3535,3002 3535,3135 3672.87,3272.87 R5.6@3743.19,3272.87
BUMP4: R5.7 U14.2 | length 2458.2
  Top Layer w8: v1(3620,3151) 3620,3174 3703.13,3257.13 R5.7@3743.19,3257.13 ; v1@4640,2393 4720,2473 U14.2@4742,2473
  Bottom Layer w8: v1@3620.36,3150.36 3620.36,3113.36 3533.5,3026.5 3533.5,3000.5 3501,2968 3480.5,2968 3354,2841.5 3354,2818 3413,2759 3413,2583 3751,2245 4346,2245 4494,2393 v1@4640,2393
  other v1: 4643,2393
BUMP5: R5.8 U15.2 | length 2176.3
  Top Layer w8: v1(3697,3208) 3696,3209 3696,3213 3724.38,3241.38 R5.8@3743.19,3241.38 ; U15.2@5451,3141.6 5477.31,3186.98 v1@5477.49,3187.3
  Bottom Layer w8: v1(3697,3208) 3742,3253 3795.83,3253 3797.45,3251.39 3899.36,3251.39 3933.47,3285.5 4164.13,3285.5 4191,3312.37 4191,3415 4235,3459 4409.25,3459 4409.75,3459.5 4573.5,3459.5 4621,3412 5068,3412 5270,3210 5456,3210 v1@5478,3188
  other v1: 5479,3186
BUMP6: U1.3 U16.2 | length 2654.2
  Top Layer w8: U1.3@4064.43,3485.47 4237.85,3485.47 4430.37,3678 4805,3678 v1@4835,3648 ; v1(5323,5078) U16.2@5350,5036
  Bottom Layer w8: v1@4836,3649 4875,3688 4875,3743 ; 4875,3744.65 4875,4531 5010.5,4666.5 5010.5,4846.5 5044,4880 5236,4880 5265,4909 5265,5020 v1(5323,5078)
  other v1: 4836,3647
BUMP7: U1.2 U17.2 | length 3563.5
  Top Layer w8: U1.2@4064.43,3465.79 4144,3466 ; 4145,3466 4241,3466 4437,3662 4748,3662 v1(4773,3637) ; v1@4392.43,5657.12 U17.2@4484.03,5622.2 ; v1@4727,4727 4727,4697 v1@4858,4566
  Bottom Layer w8: v1(4395,5659) 4461,5725 4648,5725 4916,5457 4916,4881 4763,4728 v1@4728,4728 ; v1(4773,3637) 4859,3723 4859,3751 ; 4859,3751.28 v1@4859,4566
  other v1: 4858,4565 4728,4727
CHRG: J1.14 R20.1 U2.16 | length 2924.7
  Top Layer w8: J1.14@4001,5198.02 v1@4001,5291 ; v1(4489,4969) R20.1@4613,4969 ; v1@4632,3583 4632,3564.65 4617.5,3550.15 4617.5,3427.5 4699,3346 4753,3346 4771.16,3327.84 U2.16@4771.16,3228.83 ; v1@4632,4570 v1@4632,4724
  Bottom Layer w8: v1@4001,5294 4001,5320 4022,5341 4339,5341 4363,5317 4363,5096 4489,4970 v1(4489,4969) ; v1@4494.5,4965.5 4632,4828 v1@4632,4719 ; v1@4632,3582 v1@4632,4570
  other v1: 4632,3585 4631,4570 4633,4728 3999,5292
CHRGEN: J1.12 R18.2 U2.23 U5.3 | length 5338.6
  Top Layer w8: U5.3@3042,4963.76 3042,5003 3072,5033 3519,5033 v1@3576,4976 ; v1@3642,4731 3951,4731 v1@3993,4773 ; J1.12@3952,5197.02 v1@3952,5290 ; v1@4004,4773 4738,4773 4763,4748 4763,4707 4939,4531 v1(4939,4498) ; R18.2@4275,3260.47 4309.47,3260.47 ; U2.23@4698.32,3116.63 4671.63,3116.63 4646,3091 4646,3058 4634.5,3046.5 4446,3046.5 4309.5,3183 4309.5,3377.5 4440,3508 4440,3593.37 4492.63,3646 4702.5,3646 4741,3607.5 4838.22,3607.5 4871.22,3640.5 v1(4887,3640.5)
  Bottom Layer w8: v1@3578,4974 3578,4796 v1@3640.5,4733.5 ; v1@3951,5292 3951,4827 v1(4004,4774) ; v1(4887,3640.5) 4887.5,3640.5 4939,3692 v1@4939,4497
  other v1: 3640,4733 3578,4978 3951,5293
CLIFF1: Q1.3 R42.1 U1.15 | length 2713.6
  Top Layer w8: v1@3504,4541 3504,4713 v1@3531.5,4740.5 ; v1@3853,3761 3853,3702 3916.79,3638.21 U1.15@3916.79,3613.43 ; v1@4095,5430 Q1.3@4095,5484 ; Q1.3@4095,5486 Q1.3@4095,5484 ; R42.1@4165,5508 4144,5508 4120,5484 Q1.3@4084.43,5484 Q1.3@4095,5484
  Bottom Layer w8: v1@3504,4541 3504,4248.8 3822,3930.8 3822,3789 v1@3850,3761 ; v1@3532.25,4745.25 3456.5,4821 3456.5,5225.5 3594,5363 4051,5363 4095,5407 v1@4095,5430
  other v1: 3854,3766 3505,4541 3542,4742 4094,5435